# EAGLE board Rotating Section (EAGLE 9.4.2)
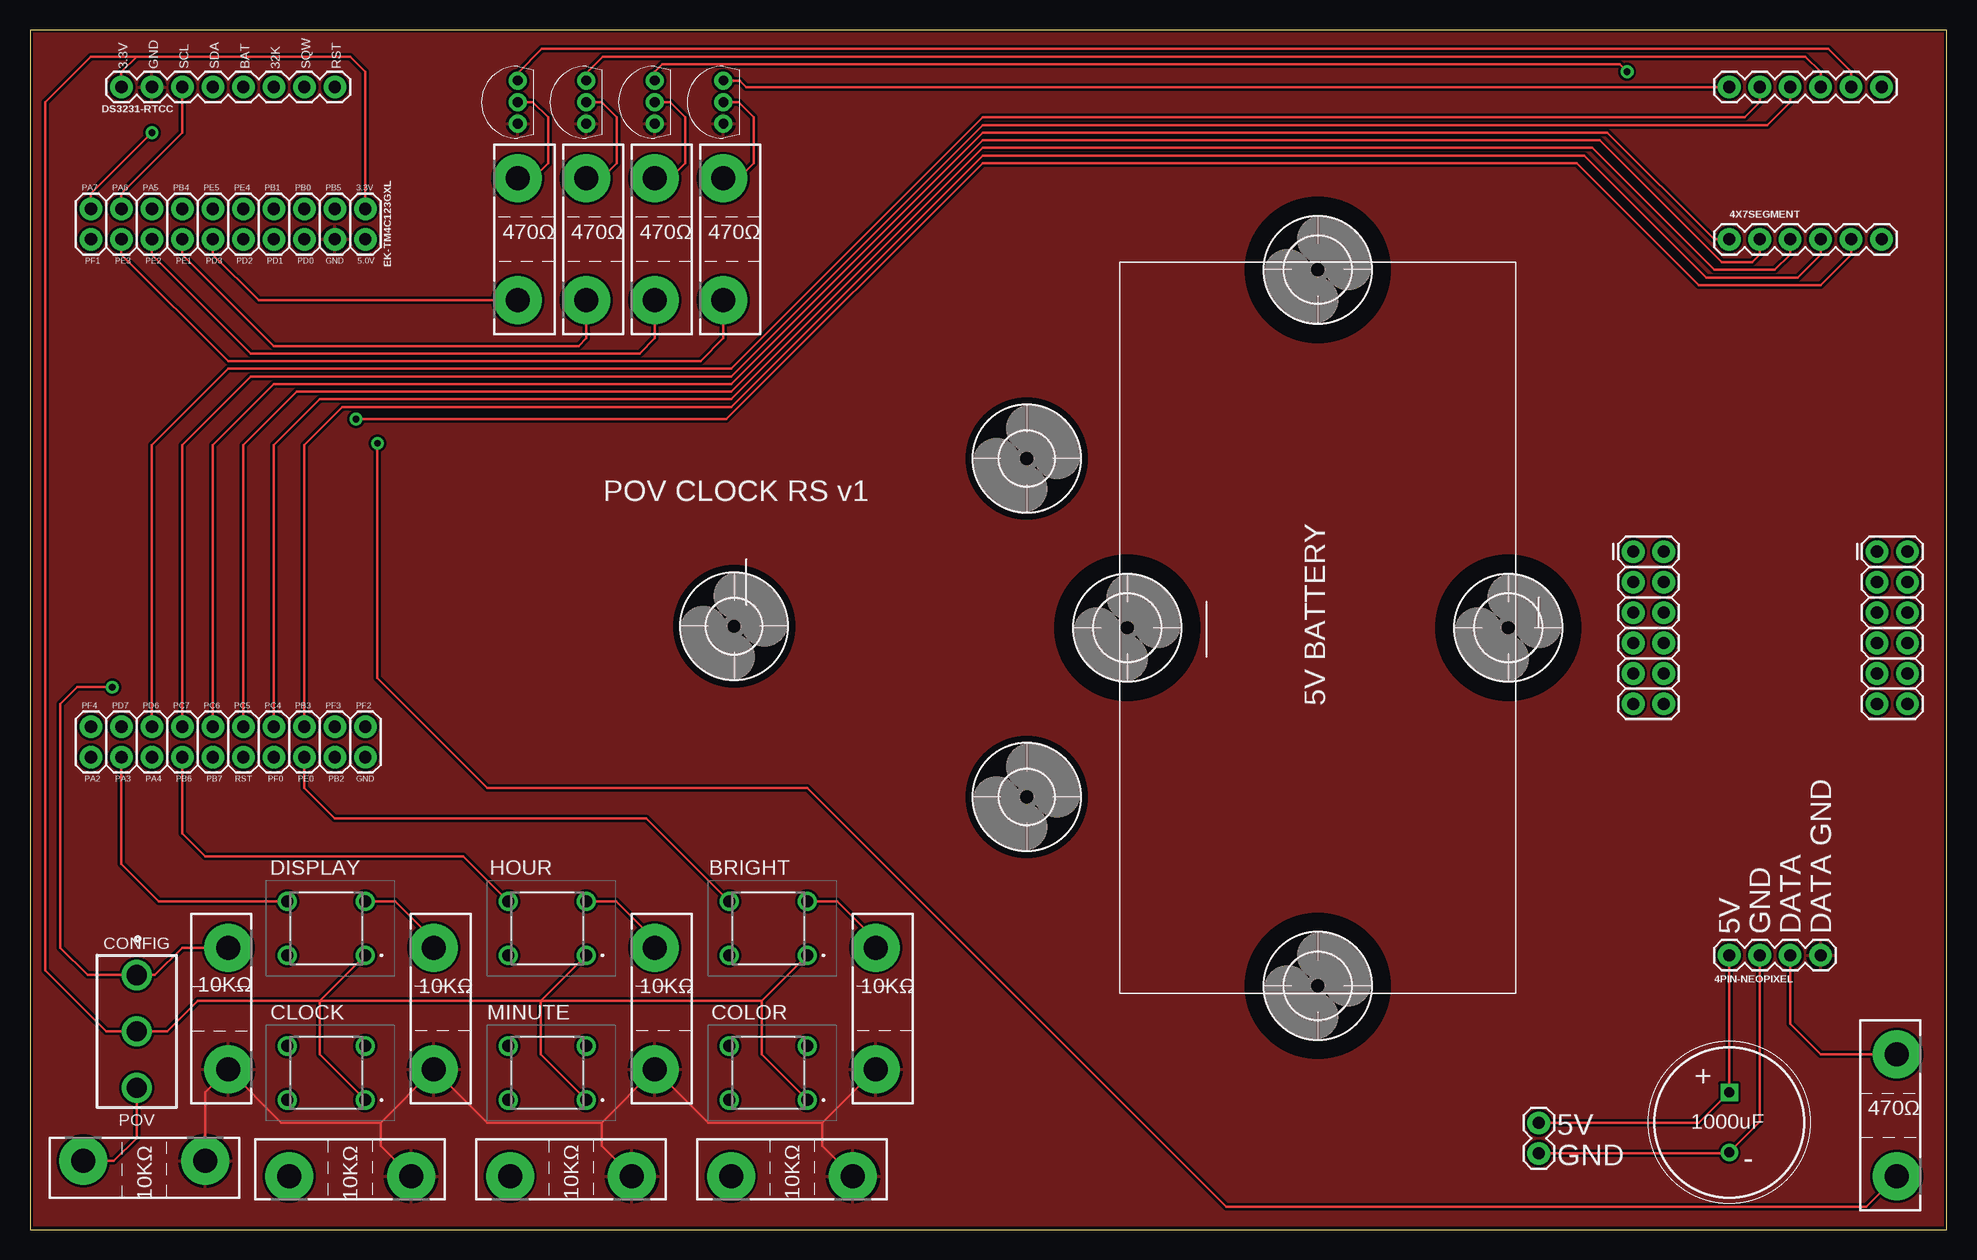
[diagram p0: board, top side]
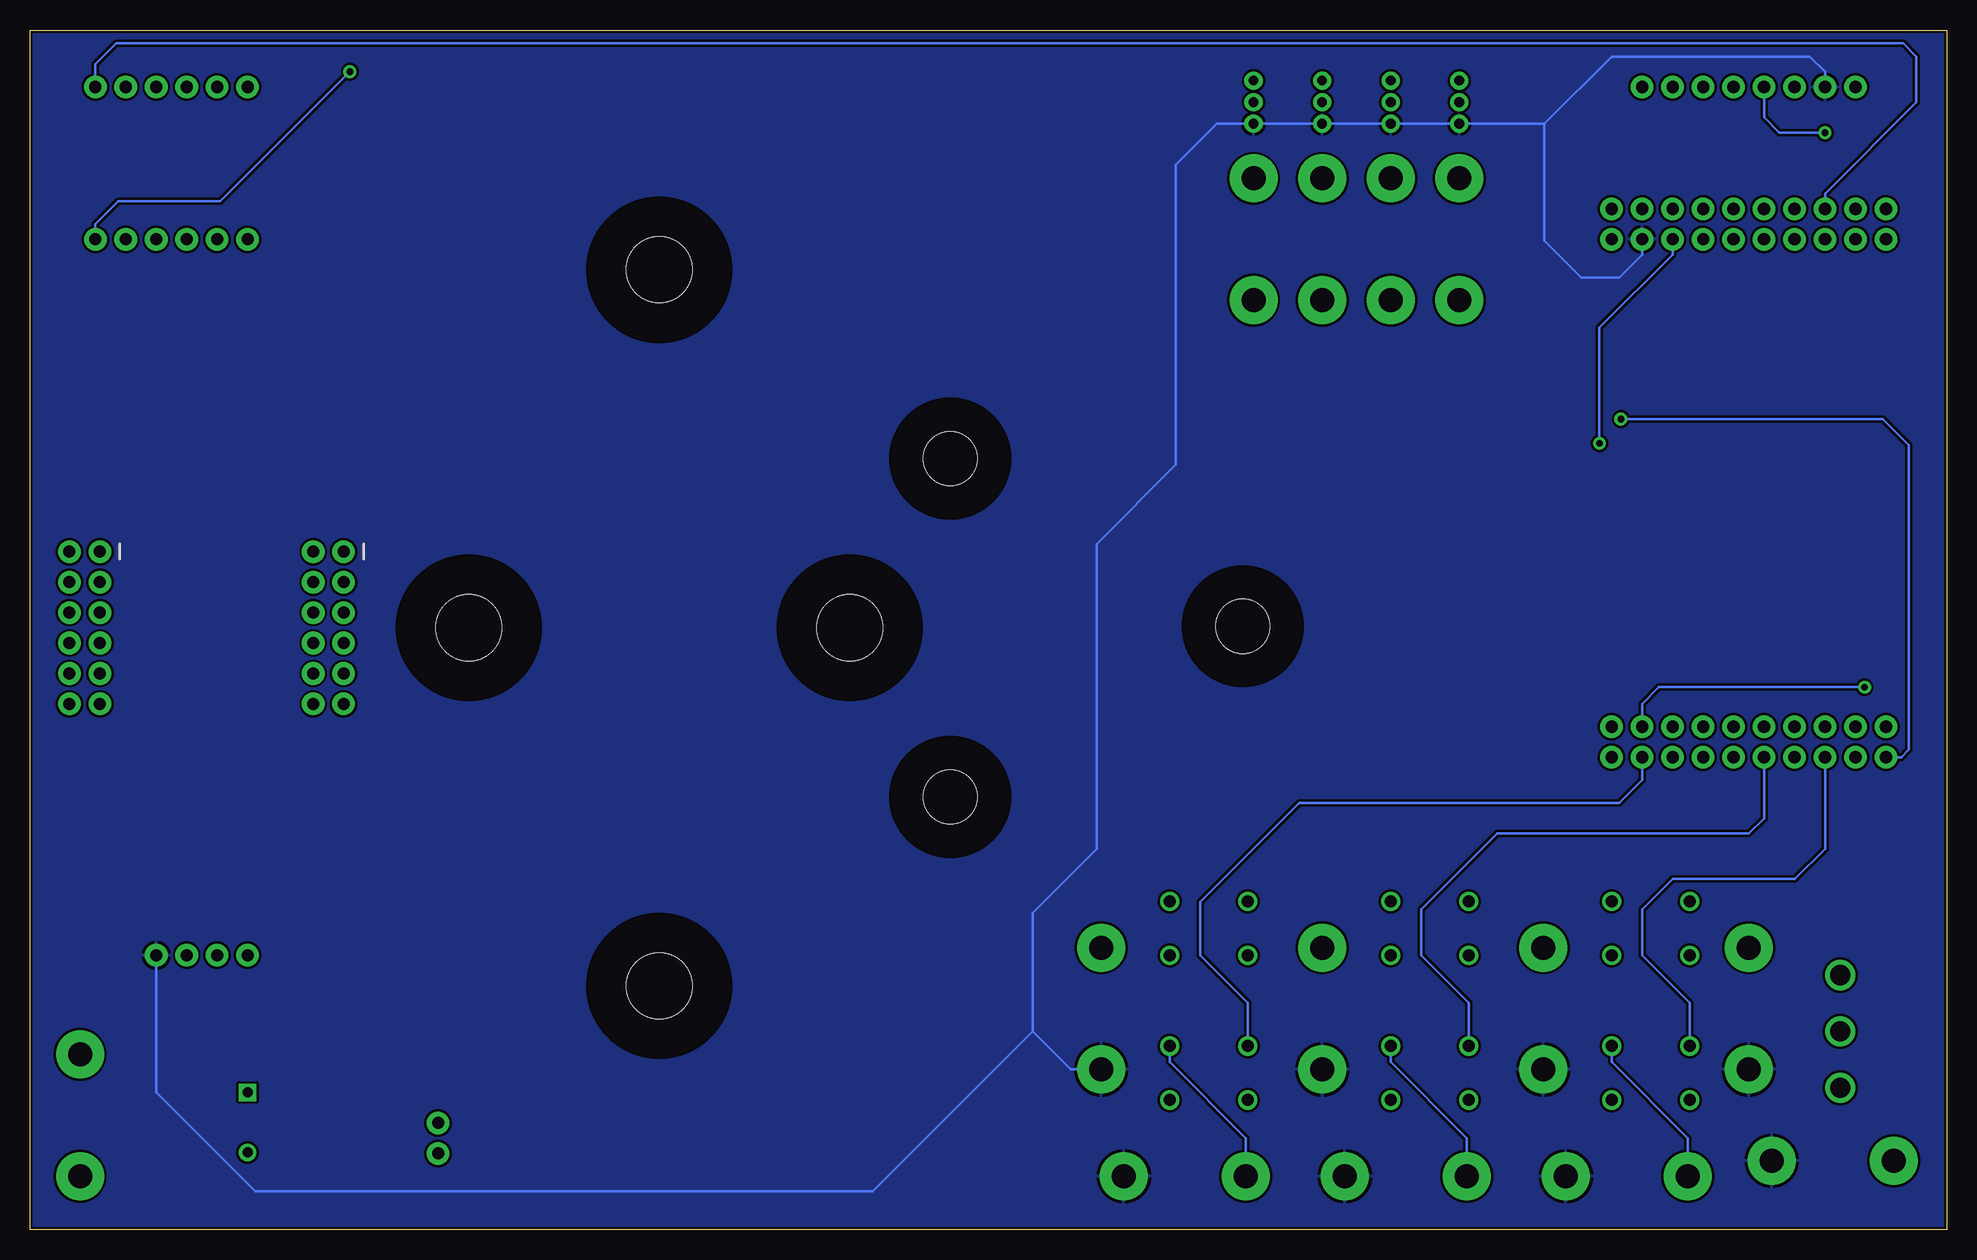
[diagram p1: board, bottom side, seen from below]

Size 159.75 x 100 mm. Coordinates in mm from the lower left corner, seen from the top.
Outline: 0,0 159.75,0 159.75,100 0,100 0,0
Copper layers (1*16): Top 0.035mm / dielectric 1.5mm / Bottom 0.035mm
Design rules "SparkFun": minimum track width 8mil, minimum drill 20mil, track to track 8mil, track to pad 8mil, pad to pad 8mil, via to via 8mil, smd to smd 8mil, copper to edge 8mil, drill to drill 8mil, minimum pad ring 12mil, minimum via ring 10mil, stop-mask expansion 4mil, vias tented up to drill 20mil, thermal gap 10mil

## Footprints (pad centres in the part's own frame; a part is rotated, then mirrored left to right if it is on the bottom)
PTS645SL432LFS = drill 1 pad 1.5: 1 0,0; 2 6.5,0; 3 0,-4.5; 4 6.5,-4.5
CAPPRD500W65D1250H2200 = drill 0.85 pad 1.275 square: 1 0,0 | drill 0.85 pad 1.275: 2 5,0
LEDPANEL = drill 1.016 pad 1.88: 1 -11.43,6.35; 2 -8.89,6.35; 3 -11.43,3.81; 4 -8.89,3.81; 5 -11.43,1.27; 6 -8.89,1.27; 7 -11.43,-1.27; 8 -8.89,-1.27; 9 -11.43,-3.81; 10 -8.89,-3.81; 11 -11.43,-6.35; 12 -8.89,-6.35; 13 8.89,6.35; 14 11.43,6.35; 15 8.89,3.81; 16 11.43,3.81; 17 8.89,1.27; 18 11.43,1.27; 19 8.89,-1.27; 20 11.43,-1.27; 21 8.89,-3.81; 22 11.43,-3.81; 23 8.89,-6.35; 24 11.43,-6.35
5,5 = hole 5.5: 0,0
4,5 = hole 4.5: 0,0
TO-92 = drill 0.81 pad 1.51: 1 0,-1.8; 2 0,0; 3 0,1.8
TO-247-2V = drill 2 pad 4: 1 -5.08,0; 2 5.08,0
1000-SERIES(SPDT) = drill 1.68 pad 2.48: 1 0,-4.7; 2 0,0; 3 0,4.7
4X7SEGMENT = drill 1.016 pad 1.88: 1 -6.35,0; 2 -3.81,0; 3 -1.27,0; 4 1.27,0; 5 3.81,0; 6 6.35,0; 7 6.35,12.7; 8 3.81,12.7; 9 1.27,12.7; 10 -1.27,12.7; 11 -3.81,12.7; 12 -6.35,12.7
1X08 = drill 1.016 pad 1.88: 1 0,0; 2 2.54,0; 3 5.08,0; 4 7.62,0; 5 10.16,0; 6 12.7,0; 7 15.24,0; 8 17.78,0
EK-TM4C123GXL = drill 1.016 pad 1.88: 1 -21.59,11.43; 2 -19.05,11.43; 3 -21.59,8.89; 4 -19.05,8.89; 5 -21.59,6.35; 6 -19.05,6.35; 7 -21.59,3.81; 8 -19.05,3.81; 9 -21.59,1.27; 10 -19.05,1.27; 11 -21.59,-1.27; 12 -19.05,-1.27; 13 -21.59,-3.81; 14 -19.05,-3.81; 15 -21.59,-6.35; 16 -19.05,-6.35; 17 -21.59,-8.89; 18 -19.05,-8.89; 19 -21.59,-11.43; 20 -19.05,-11.43; 21 21.59,11.43; 22 24.13,11.43; 23 21.59,8.89; 24 24.13,8.89; 25 21.59,6.35; 26 24.13,6.35; 27 21.59,3.81; 28 24.13,3.81; 29 21.59,1.27; 30 24.13,1.27; 31 21.59,-1.27; 32 24.13,-1.27; 33 21.59,-3.81; 34 24.13,-3.81; 35 21.59,-6.35; 36 24.13,-6.35; 37 21.59,-8.89; 38 24.13,-8.89; 39 21.59,-11.43; 40 24.13,-11.43
4PIN-NEOPIXEL = drill 1.016 pad 1.88: 1 2.54,3.81; 2 2.54,1.27; 3 2.54,-1.27; 4 2.54,-3.81
2PIN-BATTERY = drill 1.016 pad 1.88: 1 0,3.81; 2 0,1.27

## Placement (x,y rotation side)
BRIGHT  PTS645SL432LFS  [PTS645SL432LFS]  64.77,22.86 180 top
C1  1000uF  [CAPPRD500W65D1250H2200]  141.6,11.43 270 top
CLOCK  PTS645SL432LFS  [PTS645SL432LFS]  27.94,10.79 180 top
COLOR  PTS645SL432LFS  [PTS645SL432LFS]  64.77,10.79 180 top
DISPLAY  PTS645SL432LFS  [PTS645SL432LFS]  27.94,22.86 180 top
E$1  [LEDPANEL]  145.03,50.16 0 top
E$2  [5VBATTERY]  108.58,67.94 0 top
E$3  [5,5]  107.31,80.01 0 top
E$8  [4,5]  58.67,50.29 0 top
E$9  [4,5]  83.06,64.26 0 top
E$10  [4,5]  83.06,36.07 0 top
E$11  [5,5]  91.44,50.16 0 top
E$12  [5,5]  123.19,50.16 0 top
E$13  [5,5]  107.31,20.32 0 top
HOUR  PTS645SL432LFS  [PTS645SL432LFS]  46.35,22.86 180 top
MINUTE  PTS645SL432LFS  [PTS645SL432LFS]  46.35,10.79 180 top
Q1  P2N2222AG  [TO-92]  57.78,93.98 0 top
Q2  P2N2222AG  [TO-92]  52.07,93.98 0 top
Q3  P2N2222AG  [TO-92]  40.64,93.98 0 top
Q4  P2N2222AG  [TO-92]  46.35,93.98 0 top
R1  10KΩ  [TO-247-2V]  16.51,18.41 90 top
R2  10KΩ  [TO-247-2V]  9.53,5.71 180 top
R3  10KΩ  [TO-247-2V]  63.5,4.45 0 top
R4  10KΩ  [TO-247-2V]  70.48,18.41 270 top
R5  10KΩ  [TO-247-2V]  45.09,4.45 0 top
R6  10KΩ  [TO-247-2V]  52.07,18.41 270 top
R7  10KΩ  [TO-247-2V]  26.67,4.45 0 top
R8  10KΩ  [TO-247-2V]  33.66,18.41 270 top
R9  470Ω  [TO-247-2V]  57.78,82.55 270 top
R10  470Ω  [TO-247-2V]  46.35,82.55 270 top
R11  470Ω  [TO-247-2V]  40.64,82.55 270 top
R12  470Ω  [TO-247-2V]  52.07,82.55 270 top
R13  470Ω  [TO-247-2V]  155.57,9.53 90 top
S1  1101M2S3CQE2  [1000-SERIES(SPDT)]  8.89,16.51 180 top
U$1  4X7SEGMENT  [4X7SEGMENT]  147.96,82.55 0 top
U$2  DS3231-RTCC  [1X08]  7.62,95.25 0 top
U$3  EK-TM4C123GXL  [EK-TM4C123GXL]  16.51,63.5 270 top
U$4  4PIN-NEOPIXEL  [4PIN-NEOPIXEL]  145.41,20.32 90 top
U$5  2PIN-BATTERY  [2PIN-BATTERY]  125.73,5.08 0 top

## Library data of the parts
BRIGHT CLOCK COLOR DISPLAY HOUR MINUTE = PTS645SL432LFS; DESCRIPTION: Tactile Switches SWITCH TACTILE; HEIGHT: 4.4mm; MANUFACTURER_NAME: C&K Switches; MANUFACTURER_PART_NUMBER: PTS645SL432LFS; MOUSER_PART_NUMBER: 611-PTS645SL432
C1 = EEU-FP1V102; DESCRIPTION: Aluminum Electrolytic Capacitors - Radial Leaded 35VDC 1000uF 20% ESR 0.038ohm AECQ200; HEIGHT: 22mm; MANUFACTURER_NAME: Panasonic; MANUFACTURER_PART_NUMBER: EEU-FP1V102; MOUSER_PART_NUMBER: 667-EEU-FP1V102; MOUSER_PRICE-STOCK: https://www.mouser.com/Search/Refine.aspx?Keyword=667-EEU-FP1V102
E$1 E$2 U$4 U$5 = Custom
E$3 E$8-E$13 = holes
Q1-Q4 = 2N2222A; DESCRIPTION: NPN transistor,P2N2222A 0.6A Ic 10Vce ON Semi P2N2222AG NPN Bipolar Transistor, 0.6 A 40 V, 3-Pin TO-92; HEIGHT: mm; MANUFACTURER_NAME: ON Semiconductor; MANUFACTURER_PART_NUMBER: P2N2222AG; MOUSER_PART_NUMBER: 863-P2N2222AG; MOUSER_PRICE-STOCK: https://www.mouser.com/Search/Refine.aspx?Keyword=863-P2N2222AG
R1-R13 = resistor-power; OC_FARNELL: unknown; OC_NEWARK: unknown
S1 = Slide Switch 1101M2S3CQE2; DESCRIPTION: 1101M2S3CQE2 (Slide Switches); HEIGHT: mm; MANUFACTURER_NAME: C & K COMPONENTS; MANUFACTURER_PART_NUMBER: 1101M2S3CQE2; MOUSER_PART_NUMBER: 611-1101M2S3CQE2; MOUSER_PRICE-STOCK: https://www.mouser.com/Search/Refine.aspx?Keyword=611-1101M2S3CQE2
U$1-U$3 = Misc

## Nets
3.3V: BRIGHT.1 CLOCK.1 COLOR.1 DISPLAY.1 HOUR.1 MINUTE.1 S1.2 U$2.1 U$3.1
BAT: U$2.5
DATA: R13.1 U$3.6
GND: Q1.1 Q2.1 Q3.1 Q4.1 R1.1 R2.1 R3.2 R4.2 R5.2 R6.2 R7.2 R8.2 U$2.2 U$3.4 U$4.4
GND4: U$3.22
N$1: U$2.3 U$3.17
N$2: U$2.4 U$3.19
N$3: R2.2 S1.3
N$4: COLOR.4 U$3.24
N$5: R1.2 S1.1 U$3.23
N$6: BRIGHT.4 U$3.26
N$7: MINUTE.4 U$3.32
N$8: HOUR.4 U$3.34
N$9: CLOCK.4 U$3.36
N$10: DISPLAY.4 U$3.38
N$11: COLOR.3 R3.1
N$12: BRIGHT.3 R4.1
N$13: MINUTE.3 R5.1
N$14: HOUR.3 R6.1
N$15: CLOCK.3 R7.1
N$16: DISPLAY.3 R8.1
N$17: R9.2 U$3.18
N$18: Q1.2 R9.1
N$19: R11.2 U$3.12
N$20: Q1.3 U$1.12
N$21: U$1.10 U$3.33
N$22: U$1.11 U$3.35
N$23: R10.2 U$3.14
N$24: U$1.1 U$3.31
N$25: U$1.2 U$3.29
N$26: U$1.3 U$3.27
N$27: U$1.4 U$3.25
N$28: U$1.5 U$3.40
N$29: U$1.7 U$3.15
N$30: Q4.2 R10.1
N$31: Q3.2 R11.1
N$32: R12.2 U$3.16
N$33: Q4.3 U$1.9
N$34: Q3.3 U$1.8
N$35: Q2.2 R12.1
N$36: Q2.3 U$1.6
N$37: R13.2 U$4.3
N$38: C1.1 U$4.1 U$5.1
N$39: C1.2 U$4.2 U$5.2
VBUS: U$3.2

## Tracks (layer width: path | path; a pad name or v marks a point on that pad's centre or on a via)
3.3V
  Top 0.229: U$3.1 27.94,96.52 26.67,97.79 8.89,97.79 | 8.89,97.79 5.08,97.79 1.27,93.98 1.27,21.59 6.35,16.51 S1.2 11.43,16.51 13.97,19.05 24.13,19.05 | U$2.1 7.62,96.52 8.89,97.79 | DISPLAY.1 24.13,19.05 | CLOCK.1 24.13,14.61 24.13,19.05 | 24.13,19.05 42.55,19.05 | 42.55,19.05 60.96,19.05 | HOUR.1 42.55,19.05 | MINUTE.1 42.55,14.61 42.55,19.05 | BRIGHT.1 60.96,19.05 | COLOR.1 60.96,14.61 60.96,19.05
DATA  (via drill 0.55)
  Top 0.229: R13.1 153.03,1.91 99.69,1.91 64.77,36.83 38.1,36.83 28.96,45.97 v28.96,65.53
  Bottom 0.229: U$3.6 22.86,81.28 28.96,75.18 v28.96,65.53
GND
  Top 0.229: R2.1 14.61,11.43 R1.1 20.95,8.89 29.21,8.89 | 29.21,8.89 R8.2 38.1,8.89 47.62,8.89 | R7.2 29.21,6.99 29.21,8.89 | 47.62,8.89 R6.2 56.52,8.89 66.04,8.89 | R5.2 47.62,6.99 47.62,8.89 | 66.04,8.89 R4.2 | R3.2 66.04,6.99 66.04,8.89
  Bottom 0.229: U$2.2 10.16,96.52 11.43,97.79 27.94,97.79 33.55,92.18 | U$3.4 25.4,81.28 27.3,79.38 30.48,79.38 33.55,82.44 33.55,92.18 | 33.55,92.18 Q3.1 Q4.1 Q2.1 Q1.1 60.85,92.18 64.26,88.77 64.26,63.75 70.87,57.15 70.87,31.75 76.2,26.42 76.2,16.51 | R4.2 73.03,13.34 76.2,16.51 | 76.2,16.51 89.53,3.17 140.97,3.17 149.22,11.43 U$4.4
  pour Bottom (isolate 0): 0.25,99.82 159.51,99.82 159.51,0.25 0.25,0.25
  pour Top (isolate 0): 0.25,99.82 159.51,99.82 159.51,0.25 0.25,0.25
N$1
  Top 0.229: U$3.17 7.62,86.36 12.7,91.44 U$2.3
N$2  (via drill 0.55)
  Top 0.229: U$3.19 5.08,86.36 v10.16,91.44
  Bottom 0.229: U$2.4 15.24,92.71 13.97,91.44 v10.16,91.44
N$3
  Top 0.229: R2.2 6.99,5.71 8.89,7.62 S1.3
N$4
  Bottom 0.229: U$3.24 25.4,37.47 27.3,35.56 53.98,35.56 62.23,27.3 62.23,22.86 58.27,18.9 COLOR.4
N$5  (via drill 0.55)
  Top 0.229: R1.2 12.7,23.5 10.41,21.21 S1.1 4.83,21.21 2.54,23.5 2.54,43.81 3.94,45.21 v6.86,45.21
  Bottom 0.229: U$3.23 25.4,43.81 24,45.21 v6.86,45.21
N$6
  Top 0.229: U$3.26 22.86,36.83 25.4,34.29 51.34,34.29 BRIGHT.4
N$7
  Bottom 0.229: U$3.32 15.24,34.29 16.51,33.02 37.47,33.02 43.81,26.67 43.81,22.86 39.85,18.9 MINUTE.4
N$8
  Top 0.229: U$3.34 12.7,33.02 14.61,31.11 36.1,31.11 HOUR.4
N$9
  Bottom 0.229: U$3.36 10.16,31.75 12.7,29.21 22.86,29.21 25.4,26.67 25.4,22.86 21.44,18.9 CLOCK.4
N$10
  Top 0.229: U$3.38 7.62,30.48 10.74,27.36 DISPLAY.4
N$11
  Bottom 0.229: R3.1 58.42,7.62 64.77,13.97 COLOR.3
N$12
  Top 0.229: BRIGHT.3 67.25,27.36 70.48,24.13 R4.1
N$13
  Bottom 0.229: R5.1 40.01,7.62 46.35,13.97 MINUTE.3
N$14
  Top 0.229: HOUR.3 48.84,27.36 52.07,24.13 R6.1
N$15
  Bottom 0.229: R7.1 21.59,7.62 27.94,13.97 CLOCK.3
N$16
  Top 0.229: DISPLAY.3 30.43,27.36 33.66,24.13 R8.1
N$17
  Top 0.229: U$3.18 7.62,81.28 16.51,72.39 55.88,72.39 57.78,74.3 R9.2
N$18
  Top 0.229: Q1.2 59.05,93.98 60.33,92.71 60.33,88.9 59.05,87.63 R9.1
N$19
  Top 0.229: U$3.12 15.24,81.28 19.05,77.47 R11.2
N$20
  Top 0.229: Q1.3 59.14,95.78 59.67,95.25 U$1.12
N$21
  Top 0.229: U$3.33 12.7,65.41 18.41,71.12 58.42,71.12 79.38,92.08 144.78,92.08 146.69,93.98 U$1.10
N$22
  Top 0.229: U$3.35 10.16,65.41 16.51,71.75 58.42,71.75 79.38,92.71 142.88,92.71 144.15,93.98 U$1.11
N$23
  Top 0.229: U$3.14 12.7,81.28 20.32,73.66 45.72,73.66 46.35,74.3 R10.2
N$24
  Top 0.229: U$3.31 15.24,65.41 20.32,70.48 58.42,70.48 79.38,91.44 131.44,91.44 140.34,82.55 U$1.1
N$25
  Top 0.229: U$3.29 17.78,65.41 22.23,69.85 58.42,69.85 79.38,90.81 130.81,90.81 140.97,80.64 143.51,80.64 144.15,81.28 U$1.2
N$26
  Top 0.229: U$3.27 20.32,65.41 24.13,69.22 58.42,69.22 79.38,90.17 130.18,90.17 140.34,80.01 145.41,80.01 146.69,81.28 U$1.3
N$27
  Top 0.229: U$3.25 22.86,65.41 26.04,68.58 58.42,68.58 79.38,89.53 129.54,89.53 139.7,79.38 147.32,79.38 149.22,81.28 U$1.4
N$28  (via drill 0.55)
  Top 0.229: U$1.5 151.76,81.28 149.22,78.74 139.06,78.74 128.91,88.9 79.38,88.9 58.04,67.56 v27.18,67.56
  Bottom 0.229: U$3.40 3.81,39.37 3.17,40.01 3.17,65.41 5.33,67.56 v27.18,67.56
N$29
  Bottom 0.229: U$3.15 10.16,86.36 2.54,93.98 2.54,97.79 3.66,98.91 152.55,98.91 154.31,97.16 U$1.7
N$30
  Top 0.229: Q4.2 47.62,93.98 48.9,92.71 48.9,88.9 47.62,87.63 R10.1
N$31
  Top 0.229: Q3.2 41.91,93.98 43.18,92.71 43.18,88.9 41.91,87.63 R11.1
N$32
  Top 0.229: U$3.16 10.16,81.28 18.41,73.03 50.8,73.03 52.07,74.3 R12.2
N$33
  Top 0.229: U$1.9 149.22,96.52 147.96,97.79 47.73,97.79 46.35,96.42 Q4.3
N$34
  Top 0.229: U$1.8 151.76,96.52 149.86,98.42 42.65,98.42 40.64,96.42 Q3.3
N$35
  Top 0.229: Q2.2 53.34,93.98 54.61,92.71 54.61,88.9 53.34,87.63 R12.1
N$36  (via drill 0.55)
  Top 0.229: Q2.3 52.07,96.52 52.7,97.16 132.46,97.16 v133.1,96.52
  Bottom 0.229: U$1.6 154.31,83.82 152.4,85.72 143.89,85.72 v133.1,96.52
N$37
  Top 0.229: U$4.3 146.69,17.14 149.22,14.61 R13.2
N$38
  Top 0.229: U$4.1 C1.1 139.06,8.89 U$5.1
N$39
  Top 0.229: U$4.2 144.15,8.97 C1.2 141.53,6.35 U$5.2

## Text on the board
tPlace: 3.3V | GND | SCL | SDA | BAT | 32K | SQW | RST | PA7 | PA6 | PA5 | PB4 | PE5 | PE4 | PB1 | PB0 | PB5 | 3.3V | PF1 | PE3 | PE2 | PE1 | PD3 | PD2 | PD1 | PD0 | GND | 5.0V | POV CLOCK RS v1 | 5V BATTERY | PF4 | PD7 | PD6 | PC7 | PC6 | PC5 | PC4 | PB3 | PF3 | PF2 | PA2 | PA3 | PA4 | PB6 | PB7 | RST | PF0 | PE0 | PB2 | GND | 5V | GND | DATA | DATA GND | CONFIG | 10KΩ | + | POV | 5V | GND | -